# EAGLE board Brainc (EAGLE 6.1)

Size 100 x 80 mm. Coordinates in mm from the lower left corner, seen from the top.
Outline: 0,0 100,0 100,80 0,80 0,0
Outline: 12.06,38.1 arc180 64.14,38.1 arc180 12.06,38.1
Copper layers (1*16): Top 0.035mm / dielectric 1.5mm / Bottom 0.035mm
Design rules: minimum track width 10mil, minimum drill 24mil, track to track 8mil, track to pad 8mil, pad to pad 8mil, via to via 8mil, smd to smd 8mil, copper to edge 40mil, drill to drill 8mil, minimum pad ring 10mil, minimum via ring 8mil, stop-mask expansion 4mil, vias tented up to drill 0mil, thermal gap 10mil

## Footprints (pad centres in the part's own frame; a part is rotated, then mirrored left to right if it is on the bottom)
0603-CAP = smd 1.1 x 1: 1 -0.85,0; 2 0.85,0
EIA3216 = smd 1.4 x 1.6: A 1.4,0; C -1.4,0
PTC-1206 = smd 1 x 1.8: 1 -1.4,0; 2 1.4,0
3X2F_1MM_SMD = smd 1.702 x 0.61: P1 -1.689,1; P2 -1.689,0; P3 -1.689,-1; P4 1.689,-1; P5 1.689,0; P6 1.689,1
2X2F_1MM_SMD = smd 1.702 x 0.61: P1 -1.689,0.5; P2 -1.689,-0.5; P3 1.689,-0.5; P4 1.689,0.5
WT32 = smd 2 x 0.6: P1 -7.7,6; P2 -7.7,5; P3 -7.7,4; P4 -7.7,3; P5 -7.7,2; P6 -7.7,1; P7 -7.7,0; P8 -7.7,-1; P9 -7.7,-2; P10 -7.7,-3; P11 -7.7,-4; P12 -7.7,-5; P13 -7.7,-6; P14 -7.7,-7; P15 -7.7,-8; P16 -7.7,-9; P17 -7.7,-10; P31 7.7,-10; P32 7.7,-9; P33 7.7,-8; P34 7.7,-7; P35 7.7,-6; P36 7.7,-5; P37 7.7,-4; P38 7.7,-3; P39 7.7,-2; P40 7.7,-1; P41 7.7,0; P42 7.7,1; P43 7.7,2; P44 7.7,3; P45 7.7,4; P46 7.7,5; P47 7.7,6; P48 7.7,7; P49 7.7,8; P50 7.7,9 | smd 0.6 x 2: P18 -6,-11.7; P19 -5,-11.7; P20 -4,-11.7; P21 -3,-11.7; P22 -2,-11.7; P23 -1,-11.7; P24 0,-11.7; P25 1,-11.7; P26 2,-11.7; P27 3,-11.7; P28 4,-11.7; P29 5,-11.7; P30 6,-11.7
JST-2-SMD = smd 1 x 4.6: 1 -1,-3.7; 2 1,-3.7 | smd 1.6 x 3.4: NC1 -3.4,1.5; NC2 3.4,1.5
0603-RES = smd 1.1 x 1: 1 -0.85,0; 2 0.85,0
SOT23-5 = smd 0.55 x 1.2: 1 -0.95,-1.3; 2 0,-1.3; 3 0.95,-1.3; 4 0.95,1.3; 5 -0.95,1.3
TQFP100 = smd 1.5 x 0.297: 1 -8,6; 2 -8,5.5; 3 -8,5; 4 -8,4.5; 5 -8,4; 6 -8,3.5; 7 -8,3; 8 -8,2.5; 9 -8,2; 10 -8,1.5; 11 -8,1; 12 -8,0.5; 13 -8,0; 14 -8,-0.5; 15 -8,-1; 16 -8,-1.5; 17 -8,-2; 18 -8,-2.5; 19 -8,-3; 20 -8,-3.5; 21 -8,-4; 22 -8,-4.5; 23 -8,-5; 24 -8,-5.5; 25 -8,-6; 51 8,-6; 52 8,-5.5; 53 8,-5; 54 8,-4.5; 55 8,-4; 56 8,-3.5; 57 8,-3; 58 8,-2.5; 59 8,-2; 60 8,-1.5; 61 8,-1; 62 8,-0.5; 63 8,0; 64 8,0.5; 65 8,1; 66 8,1.5; 67 8,2; 68 8,2.5; 69 8,3; 70 8,3.5; 71 8,4; 72 8,4.5; 73 8,5; 74 8,5.5; 75 8,6 | smd 0.297 x 1.5: 26 -6,-8; 27 -5.5,-8; 28 -5,-8; 29 -4.5,-8; 30 -4,-8; 31 -3.5,-8; 32 -3,-8; 33 -2.5,-8; 34 -2,-8; 35 -1.5,-8; 36 -1,-8; 37 -0.5,-8; 38 0,-8; 39 0.5,-8; 40 1,-8; 41 1.5,-8; 42 2,-8; 43 2.5,-8; 44 3,-8; 45 3.5,-8; 46 4,-8; 47 4.5,-8; 48 5,-8; 49 5.5,-8; 50 6,-8; 76 6,8; 77 5.5,8; 78 5,8; 79 4.5,8; 80 4,8; 81 3.5,8; 82 3,8; 83 2.5,8; 84 2,8; 85 1.5,8; 86 1,8; 87 0.5,8; 88 0,8; 89 -0.5,8; 90 -1,8; 91 -1.5,8; 92 -2,8; 93 -2.5,8; 94 -3,8; 95 -3.5,8; 96 -4,8; 97 -4.5,8; 98 -5,8; 99 -5.5,8; 100 -6,8
RESONATOR-SMD = smd 0.7 x 1.7: 1 -1.2,0; 2 0,0; 3 1.2,0

## Placement (x,y rotation side)
C1  0.1uF  [0603-CAP]  50.16,48.26 180 bottom
C2  0.1uF  [0603-CAP]  52.07,27.94 0 bottom
C3  0.1uF  [0603-CAP]  39.37,35.56 90 bottom
C4  0.1uF  [0603-CAP]  60.96,41.91 270 bottom
C5  0.1uF  [0603-CAP]  60.96,33.02 270 bottom
C6  10uF  [EIA3216]  35.56,58.42 180 bottom
C7  10uF  [EIA3216]  41.91,58.42 180 bottom
C8  0.1uF  [0603-CAP]  41.91,54.61 0 bottom
F1  PTCSMD  [PTC-1206]  36.83,54.61 90 bottom
H1  3X2F_1MM_SMD  [3X2F_1MM_SMD]  38.1,46.35 0 top
H2  3X2F_1MM_SMD  [3X2F_1MM_SMD]  45.25,42.23 300 top
H3  3X2F_1MM_SMD  [3X2F_1MM_SMD]  45.25,33.97 240 top
H4  3X2F_1MM_SMD  [3X2F_1MM_SMD]  38.1,29.84 180 top
H5  3X2F_1MM_SMD  [3X2F_1MM_SMD]  30.95,33.97 120 top
H6  3X2F_1MM_SMD  [3X2F_1MM_SMD]  30.95,42.23 60 top
H7  2X2F_1MM_SMD  [2X2F_1MM_SMD]  38.1,61.91 180 top
H8  2X2F_1MM_SMD  [2X2F_1MM_SMD]  58.72,26.19 60 top
H9  2X2F_1MM_SMD  [2X2F_1MM_SMD]  17.48,26.19 300 top
IC1  WT32WT32  [WT32]  25.4,38.1 270 bottom
JP1  [JST-2-SMD]  27.94,54.61 270 bottom
R1  10k  [0603-RES]  41.91,29.21 270 bottom
U2  MIC5219-3.3  [SOT23-5]  39.37,61.59 90 bottom
U3  ATMEGA2560AU  [TQFP100]  50.8,38.1 90 bottom
Y1  8MHz  [RESONATOR-SMD]  39.37,39.37 90 bottom

## Library data of the parts
C1-C8 R1 = SparkFun-Passives
F1 U2 = SparkFun-PowerIC
H1-H9 IC1 U3 = Customs
JP1 = SparkFun-Connectors
Y1 = SparkFun-FreqCtrl

## Nets
+3V3: C1.1 C2.1 C3.1 C4.1 C7.A C8.1 R1.2 U2.5 U3.10 U3.31 U3.61 U3.80 U3.100
GND: C1.2 C2.2 C3.2 C4.2 C5.2 C6.C C7.C C8.2 JP1.1 U2.2 U3.11 U3.32 U3.62 U3.81 U3.99 Y1.2
N$1: C5.1 U3.98
N$2: U3.34 Y1.3
N$3: U3.33 Y1.1
N$4: F1.1 JP1.2
N$5: R1.1 U3.30
N$6: C6.A F1.2 U2.1 U2.3

## Tracks (layer width: path | path; a pad name or v marks a point on that pad's centre or on a via)
+3V3  (12 unrouted)
GND  (15 unrouted)
N$1  (1 unrouted)
N$2  (1 unrouted)
N$3  (1 unrouted)
N$4  (1 unrouted)
N$5  (1 unrouted)
N$6  (3 unrouted)
(copper drawn outside any net)
  shapes: Top area x5